# EAGLE board SparkFun GPS NEO_M9N_uFL-Panel (EAGLE 9.4.2), part 1 of 3
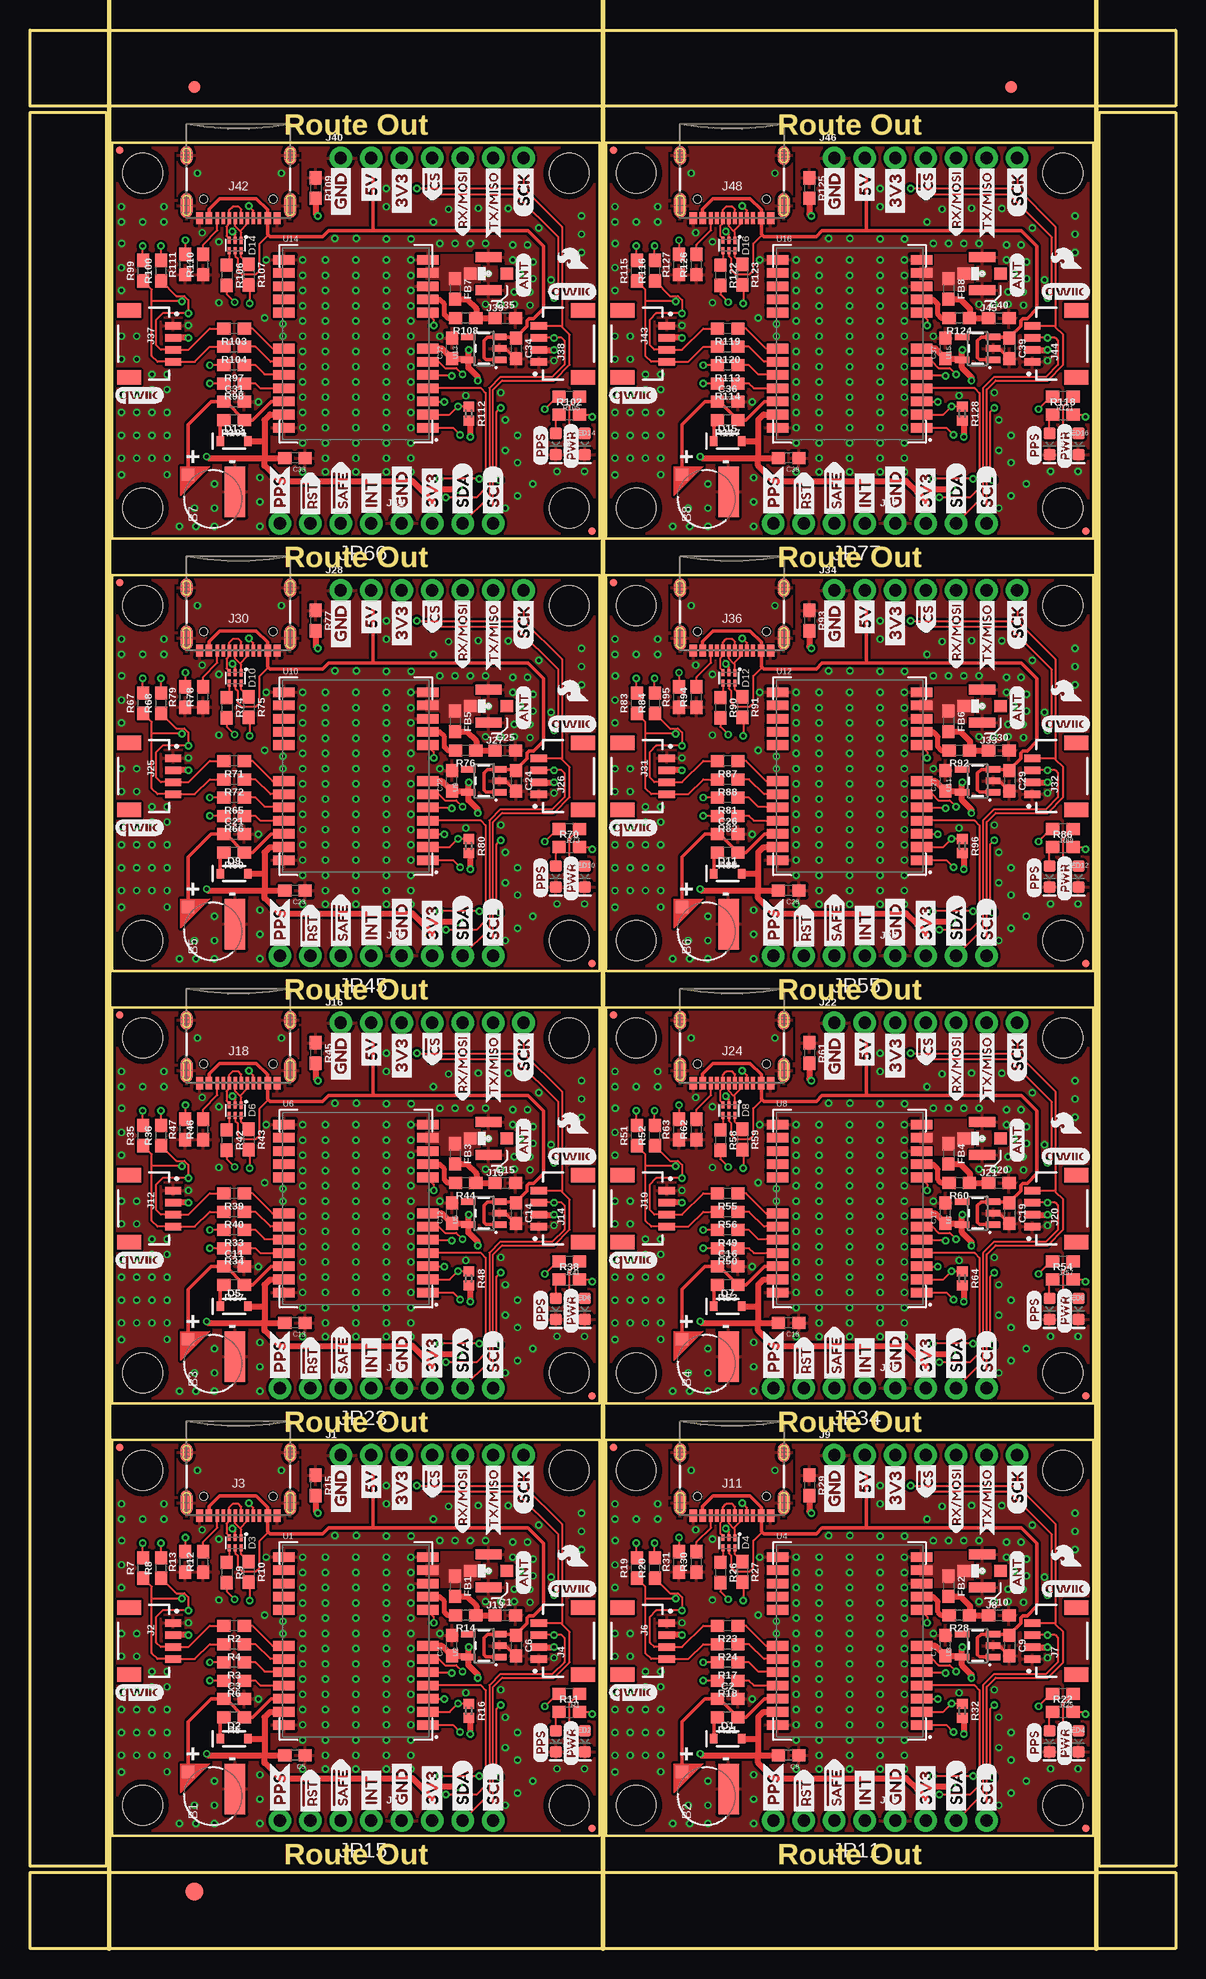
[diagram p0: board, top side]
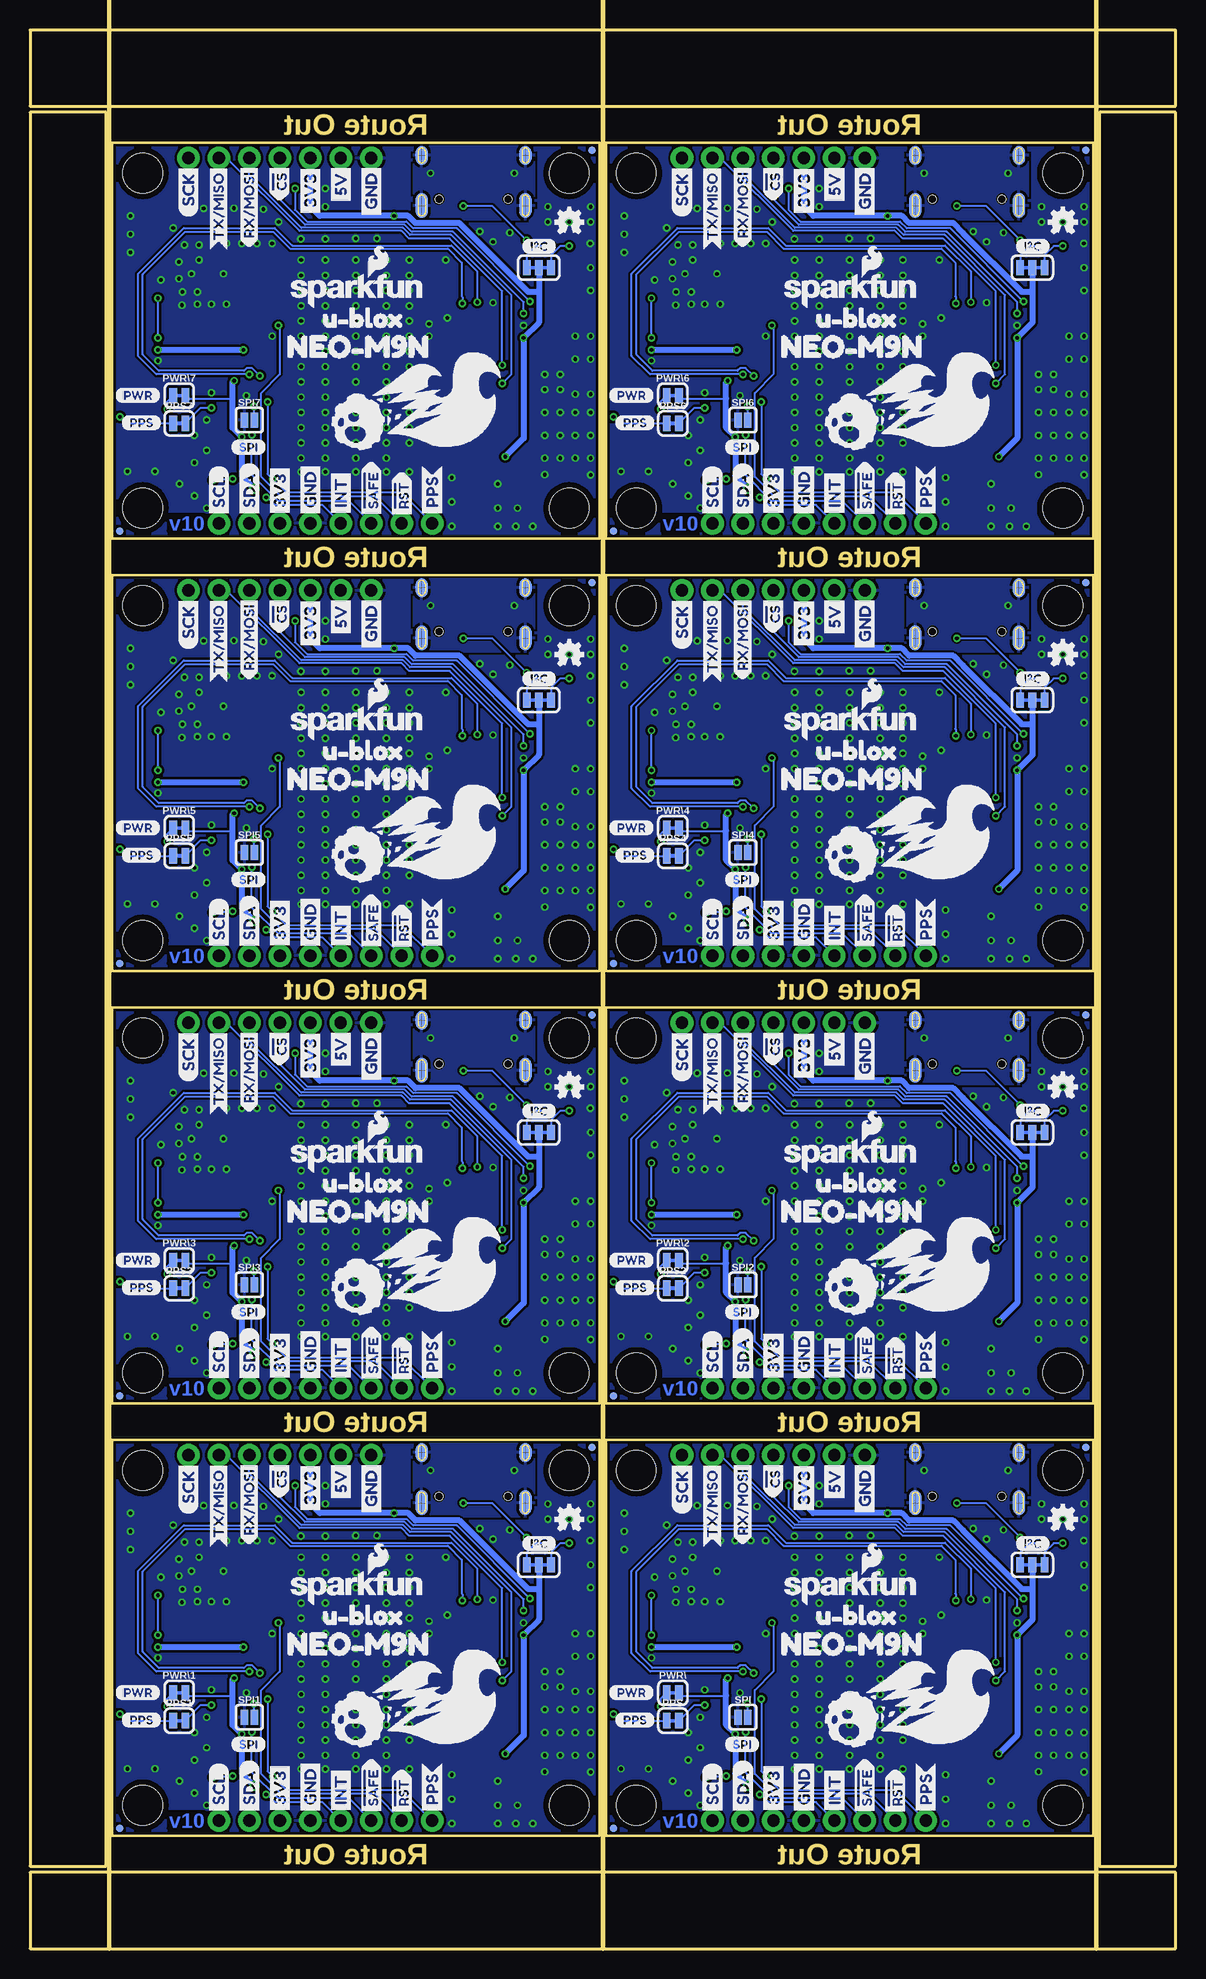
[diagram p1: board, bottom side, seen from below]

Size 95.5 x 159.92 mm. Coordinates in mm from the lower left corner, seen from the top.
Outline: 6.86,9.4 6.86,42.39 47.5,42.39 47.5,9.4 6.86,9.4
Outline: 48.01,9.4 48.01,42.39 88.65,42.39 88.65,9.4 48.01,9.4
Outline: 6.86,45.44 6.86,78.44 47.5,78.44 47.5,45.44 6.86,45.44
Outline: 48.01,45.44 48.01,78.44 88.65,78.44 88.65,45.44 48.01,45.44
Outline: 6.86,81.48 6.86,114.48 47.5,114.48 47.5,81.48 6.86,81.48
Outline: 48.01,81.48 48.01,114.48 88.65,114.48 88.65,81.48 48.01,81.48
Outline: 6.86,117.53 6.86,150.52 47.5,150.52 47.5,117.53 6.86,117.53
Outline: 48.01,117.53 48.01,150.52 88.65,150.52 88.65,117.53 48.01,117.53
Outline: 0,6.35 95.5,6.35 95.5,0 0,0 0,6.35
Outline: 89.15,153.06 95.5,153.06 95.5,6.86 89.15,6.86 89.15,153.06
Outline: 0,159.92 95.5,159.92 95.5,153.57 0,153.57 0,159.92
Outline: 0,153.06 6.35,153.06 6.35,6.86 0,6.86 0,153.06
Copper layers (1*16): Top 0.035mm / dielectric 1.5mm / Bottom 0.035mm
Design rules "SparkFun-2-layer-PCBWay-LIMIT": minimum track width 6mil, minimum drill 0.3mm, track to track 6mil, track to pad 6mil, pad to pad 6mil, via to via 6mil, smd to smd 6mil, copper to edge 6mil, drill to drill 6mil, minimum pad ring 6mil, minimum via ring 6mil, stop-mask expansion 4mil, vias tented up to drill 25mil, thermal gap 10mil
Net classes: 2 3.3V: width 0.508 mm
Milling: 3 lines

## Footprints (pad centres in the part's own frame; a part is rotated, then mirrored left to right if it is on the bottom)
ML414H_IV01E = smd 1 x 1: + 2.022,2.032 | smd 4.2 x 1.7: - 0.6,-1.85
0603 = smd 1.1 x 1: 1 -0.85,0; 2 0.85,0
SOD-323 = smd 0.63 x 0.83: A 1.15,0; C -1.15,0
SOT886 = smd 0.61 x 0.25: 1 -0.405,0.5 | smd 0.56 x 0.25: 2 -0.43,0; 3 -0.43,-0.5; 4 0.43,-0.5; 5 0.43,0; 6 0.43,0.5
FIDUCIAL-1X2 = smd 1 x 1: 1 0,0
FIDUCIAL-1.5X3 = smd 1.5 x 1.5: 1 0,0
1X07_NO_SILK = drill 1.016 pad 1.88: 1 0,0; 2 2.54,0; 3 5.08,0; 4 7.62,0; 5 10.16,0; 6 12.7,0; 7 15.24,0
JST04_1MM_RA = smd 0.6 x 1.35: 1 -1.5,0; 2 -0.5,0; 3 0.5,0; 4 1.5,0 | smd 1.2 x 2: NC1 2.8,-3.675; NC2 -2.8,-3.675
USB-C-16P = smd 0.3 x 1.016: A5 -1.25,0.154; A6 -0.25,0.154; A7 0.25,0.154; A8 1.25,0.154; B5 1.75,0.154; B6 0.75,0.154; B7 -0.75,0.154; B8 -1.75,0.154 | smd 0.6 x 1.016: GND -3.225,0.154; GND2 3.225,0.154 | smd 1 x 2.1: SHLD1 -4.32,-0.915; SHLD2 4.32,-0.915 | smd 1 x 2.1 bottom: SHLD3 -4.32,-0.915; SHLD4 4.32,-0.915 | smd 1 x 1.6: SHLD5 -4.32,-5.095; SHLD8 4.32,-5.095 | smd 1 x 1.6 bottom: SHLD6 -4.32,-5.095; SHLD7 4.32,-5.095 | smd 0.55 x 1.016: VBUS1 -2.45,0.154; VBUS2 2.45,0.154 | hole 0.65: -2.89,-1.445; 2.89,-1.445
1X04_NO_SILK = drill 1.016 pad 1.88: 1 0,0; 2 2.54,0; 3 5.08,0; 4 7.62,0
U.FL = smd 2.2 x 0.85: 1 0,1.375; 2 0,-1.375 | smd 1.05 x 1: FEED 1.525,0; NC -1.525,0
STAND-OFF = hole 3.302: 0,0
MICRO-FIDUCIAL = smd 0.635 x 0.635: 1 0,0
SMT-JUMPER_3_2-NC_TRACE_SILK = smd 0.635 x 1.27: 1 -1.016,0; 2 0,0; 3 1.016,0
LED-0603 = smd 1 x 1: A -0.877,0; C 0.877,0
SMT-JUMPER_2_NC_TRACE_SILK = smd 0.635 x 1.27: 1 -0.508,0; 2 0.508,0
0402 = smd 0.85 x 0.9: 1 -0.58,0; 2 0.58,0
SMT-JUMPER_2_NO_SILK = smd 0.635 x 1.27: 1 -0.406,0; 2 0.406,0
NEO-M9N = smd 1.8 x 0.8: 1 6,-7; 2 6,-5.9; 3 6,-4.8; 4 6,-3.7; 5 6,-2.6; 6 6,-1.5; 7 6,-0.4; 8 6,2.6; 9 6,3.7; 10 6,4.8; 11 6,5.9; 12 6,7; 13 -6,7; 14 -6,5.9; 15 -6,4.8; 16 -6,3.7; 17 -6,2.6; 18 -6,-0.4; 19 -6,-1.5; 20 -6,-2.6; 21 -6,-3.7; 22 -6,-4.8; 23 -6,-5.9; 24 -6,-7
SOT23-5 = smd 0.55 x 1.2: 1 -0.95,-1.3; 2 0,-1.3; 3 0.95,-1.3; 4 0.95,1.3; 5 -0.95,1.3

## Placement (x,y rotation side)
B1  6.8MM_COIN_CELL  [ML414H_IV01E]  15.24,12.7 90 top
B2  6.8MM_COIN_CELL  [ML414H_IV01E]  56.39,12.7 90 top
B3  6.8MM_COIN_CELL  [ML414H_IV01E]  15.24,48.74 90 top
B4  6.8MM_COIN_CELL  [ML414H_IV01E]  56.39,48.74 90 top
B5  6.8MM_COIN_CELL  [ML414H_IV01E]  15.24,84.79 90 top
B6  6.8MM_COIN_CELL  [ML414H_IV01E]  56.39,84.79 90 top
B7  6.8MM_COIN_CELL  [ML414H_IV01E]  15.24,120.83 90 top
B8  6.8MM_COIN_CELL  [ML414H_IV01E]  56.39,120.83 90 top
C1  47pF  [0603]  39.62,27.79 0 top
C2  1.0uF  [0603]  58.17,20.8 0 top
C3  1.0uF  [0603]  17.02,20.8 0 top
C4  1.0uF  [0603]  35.18,25.25 90 top
C5  0.1uF  [0603]  22.1,16.1 180 top
C6  1.0uF  [0603]  40.51,25.25 270 top
C7  1.0uF  [0603]  76.33,25.25 90 top
C8  0.1uF  [0603]  63.25,16.1 180 top
C9  1.0uF  [0603]  81.66,25.25 270 top
C10  47pF  [0603]  80.77,27.79 0 top
C11  1.0uF  [0603]  17.02,56.85 0 top
C12  1.0uF  [0603]  35.18,61.29 90 top
C13  0.1uF  [0603]  22.1,52.15 180 top
C14  1.0uF  [0603]  40.51,61.29 270 top
C15  47pF  [0603]  39.62,63.83 0 top
C16  1.0uF  [0603]  58.17,56.85 0 top
C17  1.0uF  [0603]  76.33,61.29 90 top
C18  0.1uF  [0603]  63.25,52.15 180 top
C19  1.0uF  [0603]  81.66,61.29 270 top
C20  47pF  [0603]  80.77,63.83 0 top
C21  1.0uF  [0603]  17.02,92.89 0 top
C22  1.0uF  [0603]  35.18,97.33 90 top
C23  0.1uF  [0603]  22.1,88.19 180 top
C24  1.0uF  [0603]  40.51,97.33 270 top
C25  47pF  [0603]  39.62,99.87 0 top
C26  1.0uF  [0603]  58.17,92.89 0 top
C27  1.0uF  [0603]  76.33,97.33 90 top
C28  0.1uF  [0603]  63.25,88.19 180 top
C29  1.0uF  [0603]  81.66,97.33 270 top
C30  47pF  [0603]  80.77,99.87 0 top
C31  1.0uF  [0603]  17.02,128.93 0 top
C32  1.0uF  [0603]  35.18,133.38 90 top
C33  0.1uF  [0603]  22.1,124.23 180 top
C34  1.0uF  [0603]  40.51,133.38 270 top
C35  47pF  [0603]  39.62,135.92 0 top
C36  1.0uF  [0603]  58.17,128.93 0 top
C37  1.0uF  [0603]  76.33,133.38 90 top
C38  0.1uF  [0603]  63.25,124.23 180 top
C39  1.0uF  [0603]  81.66,133.38 270 top
C40  47pF  [0603]  80.77,135.92 0 top
D1  0.5A/40V/420mV  [SOD-323]  58.17,17.5 0 top
D2  0.5A/40V/420mV  [SOD-323]  17.02,17.5 0 top
D3  PRTR5V0U2F  [SOT886]  17.12,33.83 270 top
D4  PRTR5V0U2F  [SOT886]  58.27,33.83 270 top
D5  0.5A/40V/420mV  [SOD-323]  17.02,53.54 0 top
D6  PRTR5V0U2F  [SOT886]  17.12,69.88 270 top
D7  0.5A/40V/420mV  [SOD-323]  58.17,53.54 0 top
D8  PRTR5V0U2F  [SOT886]  58.27,69.88 270 top
D9  0.5A/40V/420mV  [SOD-323]  17.02,89.59 0 top
D10  PRTR5V0U2F  [SOT886]  17.12,105.92 270 top
D11  0.5A/40V/420mV  [SOD-323]  58.17,89.59 0 top
D12  PRTR5V0U2F  [SOT886]  58.27,105.92 270 top
D13  0.5A/40V/420mV  [SOD-323]  17.02,125.63 0 top
D14  PRTR5V0U2F  [SOT886]  17.12,141.96 270 top
D15  0.5A/40V/420mV  [SOD-323]  58.17,125.63 0 top
D16  PRTR5V0U2F  [SOT886]  58.27,141.96 270 top
E$1  [FIDUCIAL-1X2]  13.72,155.16 0 top
E$2  [FIDUCIAL-1X2]  81.79,155.16 0 top
E$3  [FIDUCIAL-1.5X3]  13.72,4.76 0 top
FB1  30Ω/1.8A  [0603]  35.43,30.2 270 top
FB2  30Ω/1.8A  [0603]  76.58,30.2 270 top
FB3  30Ω/1.8A  [0603]  35.43,66.24 270 top
FB4  30Ω/1.8A  [0603]  76.58,66.24 270 top
FB5  30Ω/1.8A  [0603]  35.43,102.29 270 top
FB6  30Ω/1.8A  [0603]  76.58,102.29 270 top
FB7  30Ω/1.8A  [0603]  35.43,138.33 270 top
FB8  30Ω/1.8A  [0603]  76.58,138.33 270 top
J1  [1X07_NO_SILK]  25.91,41.12 0 top
J2  Qwiic Right Angle  [JST04_1MM_RA]  11.94,25.63 270 top
J3  [USB-C-16P]  17.37,36.25 180 top
J4  Qwiic Right Angle  [JST04_1MM_RA]  42.42,25.63 90 top
J5  [1X04_NO_SILK]  30.99,10.67 0 top
J6  Qwiic Right Angle  [JST04_1MM_RA]  53.09,25.63 270 top
J7  Qwiic Right Angle  [JST04_1MM_RA]  83.57,25.63 90 top
J8  U.FL  [U.FL]  79.38,31.47 180 top
J9  [1X07_NO_SILK]  67.06,41.12 0 top
J10  [1X04_NO_SILK]  72.14,10.67 0 top
J11  [USB-C-16P]  58.52,36.25 180 top
J12  Qwiic Right Angle  [JST04_1MM_RA]  11.94,61.67 270 top
J13  U.FL  [U.FL]  38.23,31.47 180 top
J14  Qwiic Right Angle  [JST04_1MM_RA]  42.42,61.67 90 top
J15  U.FL  [U.FL]  38.23,67.51 180 top
J16  [1X07_NO_SILK]  25.91,77.17 0 top
J17  [1X04_NO_SILK]  30.99,46.71 0 top
J18  [USB-C-16P]  17.37,72.29 180 top
J19  Qwiic Right Angle  [JST04_1MM_RA]  53.09,61.67 270 top
J20  Qwiic Right Angle  [JST04_1MM_RA]  83.57,61.67 90 top
J21  U.FL  [U.FL]  79.38,67.51 180 top
J22  [1X07_NO_SILK]  67.06,77.17 0 top
J23  [1X04_NO_SILK]  72.14,46.71 0 top
J24  [USB-C-16P]  58.52,72.29 180 top
J25  Qwiic Right Angle  [JST04_1MM_RA]  11.94,97.71 270 top
J26  Qwiic Right Angle  [JST04_1MM_RA]  42.42,97.71 90 top
J27  U.FL  [U.FL]  38.23,103.56 180 top
J28  [1X07_NO_SILK]  25.91,113.21 0 top
J29  [1X04_NO_SILK]  30.99,82.75 0 top
J30  [USB-C-16P]  17.37,108.33 180 top
J31  Qwiic Right Angle  [JST04_1MM_RA]  53.09,97.71 270 top
J32  Qwiic Right Angle  [JST04_1MM_RA]  83.57,97.71 90 top
J33  U.FL  [U.FL]  79.38,103.56 180 top
J34  [1X07_NO_SILK]  67.06,113.21 0 top
J35  [1X04_NO_SILK]  72.14,82.75 0 top
J36  [USB-C-16P]  58.52,108.33 180 top
J37  Qwiic Right Angle  [JST04_1MM_RA]  11.94,133.76 270 top
J38  Qwiic Right Angle  [JST04_1MM_RA]  42.42,133.76 90 top
J39  U.FL  [U.FL]  38.23,139.6 180 top
J40  [1X07_NO_SILK]  25.91,149.25 0 top
J41  [1X04_NO_SILK]  30.99,118.8 0 top
J42  [USB-C-16P]  17.37,144.37 180 top
J43  Qwiic Right Angle  [JST04_1MM_RA]  53.09,133.76 270 top
J44  Qwiic Right Angle  [JST04_1MM_RA]  83.57,133.76 90 top
J45  U.FL  [U.FL]  79.38,139.6 180 top
J46  [1X07_NO_SILK]  67.06,149.25 0 top
J47  [1X04_NO_SILK]  72.14,118.8 0 top
J48  [USB-C-16P]  58.52,144.37 180 top
JP1  STAND-OFF  [STAND-OFF]  50.55,39.85 0 top
JP2  STAND-OFF  [STAND-OFF]  86.11,39.85 0 top
JP3  FIDUCIALUFIDUCIAL  [MICRO-FIDUCIAL]  88.01,10.03 0 top
JP4  FIDUCIALUFIDUCIAL  [MICRO-FIDUCIAL]  48.64,41.76 0 top
JP5  JUMPER-SMT_3_2-NC_TRACE_SILK  [SMT-JUMPER_3_2-NC_TRACE_SILK]  11.94,31.98 0 bottom
JP6  JUMPER-SMT_3_2-NC_TRACE_SILK  [SMT-JUMPER_3_2-NC_TRACE_SILK]  53.09,31.98 0 bottom
JP7  FIDUCIALUFIDUCIAL  [MICRO-FIDUCIAL]  88.01,10.03 0 bottom
JP8  FIDUCIALUFIDUCIAL  [MICRO-FIDUCIAL]  48.64,41.76 0 bottom
JP9  STAND-OFF  [STAND-OFF]  50.55,11.94 0 top
JP10  STAND-OFF  [STAND-OFF]  86.11,11.94 0 top
JP11  [1X04_NO_SILK]  69.6,10.67 180 top
JP12  STAND-OFF  [STAND-OFF]  9.4,75.9 0 top
JP13  STAND-OFF  [STAND-OFF]  44.96,75.9 0 top
JP14  FIDUCIALUFIDUCIAL  [MICRO-FIDUCIAL]  46.86,46.08 0 top
JP15  [1X04_NO_SILK]  28.45,10.67 180 top
JP16  FIDUCIALUFIDUCIAL  [MICRO-FIDUCIAL]  7.49,77.8 0 top
JP17  JUMPER-SMT_3_2-NC_TRACE_SILK  [SMT-JUMPER_3_2-NC_TRACE_SILK]  11.94,68.02 0 bottom
JP18  FIDUCIALUFIDUCIAL  [MICRO-FIDUCIAL]  46.86,46.08 0 bottom
JP19  FIDUCIALUFIDUCIAL  [MICRO-FIDUCIAL]  7.49,77.8 0 bottom
JP20  STAND-OFF  [STAND-OFF]  9.4,47.98 0 top
JP21  FIDUCIALUFIDUCIAL  [MICRO-FIDUCIAL]  46.86,10.03 0 top
JP22  STAND-OFF  [STAND-OFF]  44.96,47.98 0 top
JP23  [1X04_NO_SILK]  28.45,46.71 180 top
JP24  STAND-OFF  [STAND-OFF]  50.55,75.9 0 top
JP25  STAND-OFF  [STAND-OFF]  86.11,75.9 0 top
JP26  FIDUCIALUFIDUCIAL  [MICRO-FIDUCIAL]  88.01,46.08 0 top
JP27  FIDUCIALUFIDUCIAL  [MICRO-FIDUCIAL]  48.64,77.8 0 top
JP28  JUMPER-SMT_3_2-NC_TRACE_SILK  [SMT-JUMPER_3_2-NC_TRACE_SILK]  53.09,68.02 0 bottom
JP29  FIDUCIALUFIDUCIAL  [MICRO-FIDUCIAL]  88.01,46.08 0 bottom
JP30  FIDUCIALUFIDUCIAL  [MICRO-FIDUCIAL]  48.64,77.8 0 bottom
JP31  STAND-OFF  [STAND-OFF]  9.4,39.85 0 top
JP32  STAND-OFF  [STAND-OFF]  50.55,47.98 0 top
JP33  STAND-OFF  [STAND-OFF]  86.11,47.98 0 top
JP34  [1X04_NO_SILK]  69.6,46.71 180 top
JP35  STAND-OFF  [STAND-OFF]  9.4,111.94 0 top
JP36  STAND-OFF  [STAND-OFF]  44.96,111.94 0 top
JP37  FIDUCIALUFIDUCIAL  [MICRO-FIDUCIAL]  46.86,82.12 0 top
JP38  FIDUCIALUFIDUCIAL  [MICRO-FIDUCIAL]  7.49,113.84 0 top
JP39  JUMPER-SMT_3_2-NC_TRACE_SILK  [SMT-JUMPER_3_2-NC_TRACE_SILK]  11.94,104.06 0 bottom
JP40  FIDUCIALUFIDUCIAL  [MICRO-FIDUCIAL]  46.86,82.12 0 bottom
JP41  STAND-OFF  [STAND-OFF]  44.96,39.85 0 top
JP42  FIDUCIALUFIDUCIAL  [MICRO-FIDUCIAL]  7.49,113.84 0 bottom
JP43  STAND-OFF  [STAND-OFF]  9.4,84.02 0 top
JP44  STAND-OFF  [STAND-OFF]  44.96,84.02 0 top
JP45  [1X04_NO_SILK]  28.45,82.75 180 top
JP46  STAND-OFF  [STAND-OFF]  50.55,111.94 0 top
JP47  STAND-OFF  [STAND-OFF]  86.11,111.94 0 top
JP48  FIDUCIALUFIDUCIAL  [MICRO-FIDUCIAL]  88.01,82.12 0 top
JP49  FIDUCIALUFIDUCIAL  [MICRO-FIDUCIAL]  48.64,113.84 0 top
JP50  JUMPER-SMT_3_2-NC_TRACE_SILK  [SMT-JUMPER_3_2-NC_TRACE_SILK]  53.09,104.06 0 bottom
JP51  FIDUCIALUFIDUCIAL  [MICRO-FIDUCIAL]  88.01,82.12 0 bottom
JP52  FIDUCIALUFIDUCIAL  [MICRO-FIDUCIAL]  48.64,113.84 0 bottom
JP53  STAND-OFF  [STAND-OFF]  50.55,84.02 0 top
JP54  STAND-OFF  [STAND-OFF]  86.11,84.02 0 top
JP55  [1X04_NO_SILK]  69.6,82.75 180 top
JP56  STAND-OFF  [STAND-OFF]  9.4,147.98 0 top
JP57  STAND-OFF  [STAND-OFF]  44.96,147.98 0 top
JP58  FIDUCIALUFIDUCIAL  [MICRO-FIDUCIAL]  46.86,118.16 0 top
JP59  FIDUCIALUFIDUCIAL  [MICRO-FIDUCIAL]  7.49,149.89 0 top
JP60  JUMPER-SMT_3_2-NC_TRACE_SILK  [SMT-JUMPER_3_2-NC_TRACE_SILK]  11.94,140.11 0 bottom
JP61  FIDUCIALUFIDUCIAL  [MICRO-FIDUCIAL]  7.49,41.76 0 top
JP62  FIDUCIALUFIDUCIAL  [MICRO-FIDUCIAL]  46.86,118.16 0 bottom
JP63  FIDUCIALUFIDUCIAL  [MICRO-FIDUCIAL]  7.49,149.89 0 bottom
JP64  STAND-OFF  [STAND-OFF]  9.4,120.07 0 top
JP65  STAND-OFF  [STAND-OFF]  44.96,120.07 0 top
JP66  [1X04_NO_SILK]  28.45,118.8 180 top
JP67  STAND-OFF  [STAND-OFF]  50.55,147.98 0 top
JP68  STAND-OFF  [STAND-OFF]  86.11,147.98 0 top
JP69  FIDUCIALUFIDUCIAL  [MICRO-FIDUCIAL]  88.01,118.16 0 top
JP70  FIDUCIALUFIDUCIAL  [MICRO-FIDUCIAL]  48.64,149.89 0 top
JP71  FIDUCIALUFIDUCIAL  [MICRO-FIDUCIAL]  46.86,10.03 0 bottom
JP72  JUMPER-SMT_3_2-NC_TRACE_SILK  [SMT-JUMPER_3_2-NC_TRACE_SILK]  53.09,140.11 0 bottom
JP73  FIDUCIALUFIDUCIAL  [MICRO-FIDUCIAL]  88.01,118.16 0 bottom
JP74  FIDUCIALUFIDUCIAL  [MICRO-FIDUCIAL]  48.64,149.89 0 bottom
JP75  STAND-OFF  [STAND-OFF]  50.55,120.07 0 top
JP76  STAND-OFF  [STAND-OFF]  86.11,120.07 0 top
JP77  [1X04_NO_SILK]  69.6,118.8 180 top
JP81  FIDUCIALUFIDUCIAL  [MICRO-FIDUCIAL]  7.49,41.76 0 bottom
JP91  STAND-OFF  [STAND-OFF]  9.4,11.94 0 top
JP101  STAND-OFF  [STAND-OFF]  44.96,11.94 0 top
LED1  BLUE  [LED-0603]  43.84,17.27 270 top
LED2  RED  [LED-0603]  46.25,17.27 270 top
LED3  BLUE  [LED-0603]  84.99,17.27 270 top
LED4  RED  [LED-0603]  87.4,17.27 270 top
LED5  BLUE  [LED-0603]  43.84,53.31 270 top
LED6  RED  [LED-0603]  46.25,53.31 270 top
LED7  BLUE  [LED-0603]  84.99,53.31 270 top
LED8  RED  [LED-0603]  87.4,53.31 270 top
LED9  BLUE  [LED-0603]  43.84,89.36 270 top
LED10  RED  [LED-0603]  46.25,89.36 270 top
LED11  BLUE  [LED-0603]  84.99,89.36 270 top
LED12  RED  [LED-0603]  87.4,89.36 270 top
LED13  BLUE  [LED-0603]  43.84,125.4 270 top
LED14  RED  [LED-0603]  46.25,125.4 270 top
LED15  BLUE  [LED-0603]  84.99,125.4 270 top
LED16  RED  [LED-0603]  87.4,125.4 270 top
LOGO1  OSHW-LOGOMINI  [OSHW-LOGO-MINI]  9.4,35.79 0 bottom
LOGO2  SFE_LOGO_NAME_FLAME.1_INCH  [SFE_LOGO_NAME_FLAME_.1]  27.05,30.07 0 bottom
LOGO3  OSHW-LOGOMINI  [OSHW-LOGO-MINI]  50.55,35.79 0 bottom
LOGO4  SFE_LOGO_NAME_FLAME.1_INCH  [SFE_LOGO_NAME_FLAME_.1]  68.2,30.07 0 bottom
LOGO5  OSHW-LOGOMINI  [OSHW-LOGO-MINI]  9.4,71.83 0 bottom
LOGO6  SFE_LOGO_NAME_FLAME.1_INCH  [SFE_LOGO_NAME_FLAME_.1]  27.05,66.12 0 bottom
LOGO7  OSHW-LOGOMINI  [OSHW-LOGO-MINI]  50.55,71.83 0 bottom
LOGO8  SFE_LOGO_NAME_FLAME.1_INCH  [SFE_LOGO_NAME_FLAME_.1]  68.2,66.12 0 bottom
LOGO9  OSHW-LOGOMINI  [OSHW-LOGO-MINI]  9.4,107.87 0 bottom
LOGO10  SFE_LOGO_NAME_FLAME.1_INCH  [SFE_LOGO_NAME_FLAME_.1]  27.05,102.16 0 bottom
LOGO11  OSHW-LOGOMINI  [OSHW-LOGO-MINI]  50.55,107.87 0 bottom
LOGO12  SFE_LOGO_NAME_FLAME.1_INCH  [SFE_LOGO_NAME_FLAME_.1]  68.2,102.16 0 bottom
LOGO13  OSHW-LOGOMINI  [OSHW-LOGO-MINI]  9.4,143.92 0 bottom
LOGO14  SFE_LOGO_NAME_FLAME.1_INCH  [SFE_LOGO_NAME_FLAME_.1]  27.05,138.2 0 bottom
LOGO15  OSHW-LOGOMINI  [OSHW-LOGO-MINI]  50.55,143.92 0 bottom
LOGO16  SFE_LOGO_NAME_FLAME.1_INCH  [SFE_LOGO_NAME_FLAME_.1]  68.2,138.2 0 bottom
PPS  JUMPER-SMT_2_NC_TRACE_SILK  [SMT-JUMPER_2_NC_TRACE_SILK]  41.91,19 0 bottom
PPS1  JUMPER-SMT_2_NC_TRACE_SILK  [SMT-JUMPER_2_NC_TRACE_SILK]  83.06,19 0 bottom
PPS2  JUMPER-SMT_2_NC_TRACE_SILK  [SMT-JUMPER_2_NC_TRACE_SILK]  41.91,55.04 0 bottom
PPS3  JUMPER-SMT_2_NC_TRACE_SILK  [SMT-JUMPER_2_NC_TRACE_SILK]  83.06,55.04 0 bottom
PPS4  JUMPER-SMT_2_NC_TRACE_SILK  [SMT-JUMPER_2_NC_TRACE_SILK]  41.91,91.08 0 bottom
PPS5  JUMPER-SMT_2_NC_TRACE_SILK  [SMT-JUMPER_2_NC_TRACE_SILK]  83.06,91.08 0 bottom
PPS6  JUMPER-SMT_2_NC_TRACE_SILK  [SMT-JUMPER_2_NC_TRACE_SILK]  41.91,127.13 0 bottom
PPS7  JUMPER-SMT_2_NC_TRACE_SILK  [SMT-JUMPER_2_NC_TRACE_SILK]  83.06,127.13 0 bottom
PWR\  JUMPER-SMT_2_NC_TRACE_SILK  [SMT-JUMPER_2_NC_TRACE_SILK]  41.91,21.31 0 bottom
PWR\1  JUMPER-SMT_2_NC_TRACE_SILK  [SMT-JUMPER_2_NC_TRACE_SILK]  83.06,21.31 0 bottom
PWR\2  JUMPER-SMT_2_NC_TRACE_SILK  [SMT-JUMPER_2_NC_TRACE_SILK]  41.91,57.35 0 bottom
PWR\3  JUMPER-SMT_2_NC_TRACE_SILK  [SMT-JUMPER_2_NC_TRACE_SILK]  83.06,57.35 0 bottom
PWR\4  JUMPER-SMT_2_NC_TRACE_SILK  [SMT-JUMPER_2_NC_TRACE_SILK]  41.91,93.4 0 bottom
PWR\5  JUMPER-SMT_2_NC_TRACE_SILK  [SMT-JUMPER_2_NC_TRACE_SILK]  83.06,93.4 0 bottom
PWR\6  JUMPER-SMT_2_NC_TRACE_SILK  [SMT-JUMPER_2_NC_TRACE_SILK]  41.91,129.44 0 bottom
PWR\7  JUMPER-SMT_2_NC_TRACE_SILK  [SMT-JUMPER_2_NC_TRACE_SILK]  83.06,129.44 0 bottom
R1  1k  [0603]  44.96,21.23 180 top
R2  33  [0603]  17.02,26.9 180 top
R3  33  [0603]  17.02,23.85 180 top
R4  33  [0603]  17.02,25.37 180 top
R5  1k  [0603]  17.02,19.28 180 top
R6  33  [0603]  17.02,22.33 180 top
R7  2.2k  [0603]  9.45,31.72 90 top
R8  2.2k  [0603]  10.95,31.72 90 top
R9  27  [0603]  16.41,31.34 270 top
R10  27  [0603]  18.24,31.39 270 top
R11  1k  [0603]  44.96,19.71 0 top
R12  5.1k  [0603]  14.43,32.23 90 top
R13  5.1k  [0603]  12.95,32.23 90 top
R14  10  [0603]  36.32,27.79 180 top
R15  100k  [0603]  23.83,38.61 270 top
R16  10k  [0402]  36.58,19.81 270 top
R17  33  [0603]  58.17,23.85 180 top
R18  33  [0603]  58.17,22.33 180 top
R19  2.2k  [0603]  50.6,31.72 90 top
R20  2.2k  [0603]  52.1,31.72 90 top
R21  1k  [0603]  58.17,19.28 180 top
R22  1k  [0603]  86.11,19.71 0 top
R23  33  [0603]  58.17,26.9 180 top
R24  33  [0603]  58.17,25.37 180 top
R25  1k  [0603]  86.11,21.23 180 top
R26  27  [0603]  57.56,31.34 270 top
R27  27  [0603]  59.39,31.39 270 top
R28  10  [0603]  77.47,27.79 180 top
R29  100k  [0603]  64.97,38.61 270 top
R30  5.1k  [0603]  55.58,32.23 90 top
R31  5.1k  [0603]  54.1,32.23 90 top
R32  10k  [0402]  77.72,19.81 270 top
R33  33  [0603]  17.02,59.89 180 top
R34  33  [0603]  17.02,58.37 180 top
R35  2.2k  [0603]  9.45,67.77 90 top
R36  2.2k  [0603]  10.95,67.77 90 top
R37  1k  [0603]  17.02,55.32 180 top
R38  1k  [0603]  44.96,55.75 0 top
R39  33  [0603]  17.02,62.94 180 top
R40  33  [0603]  17.02,61.42 180 top
R41  1k  [0603]  44.96,57.28 180 top
R42  27  [0603]  16.41,67.39 270 top
R43  27  [0603]  18.24,67.44 270 top
R44  10  [0603]  36.32,63.83 180 top
R45  100k  [0603]  23.83,74.65 270 top
R46  5.1k  [0603]  14.43,68.28 90 top
R47  5.1k  [0603]  12.95,68.28 90 top
R48  10k  [0402]  36.58,55.85 270 top
R49  33  [0603]  58.17,59.89 180 top
R50  33  [0603]  58.17,58.37 180 top
R51  2.2k  [0603]  50.6,67.77 90 top
R52  2.2k  [0603]  52.1,67.77 90 top
R53  1k  [0603]  58.17,55.32 180 top
R54  1k  [0603]  86.11,55.75 0 top
R55  33  [0603]  58.17,62.94 180 top
R56  33  [0603]  58.17,61.42 180 top
R57  1k  [0603]  86.11,57.28 180 top
R58  27  [0603]  57.56,67.39 270 top
R59  27  [0603]  59.39,67.44 270 top
R60  10  [0603]  77.47,63.83 180 top
R61  100k  [0603]  64.97,74.65 270 top
R62  5.1k  [0603]  55.58,68.28 90 top
R63  5.1k  [0603]  54.1,68.28 90 top
R64  10k  [0402]  77.72,55.85 270 top
R65  33  [0603]  17.02,95.94 180 top
R66  33  [0603]  17.02,94.41 180 top
R67  2.2k  [0603]  9.45,103.81 90 top
R68  2.2k  [0603]  10.95,103.81 90 top
R69  1k  [0603]  17.02,91.36 180 top
R70  1k  [0603]  44.96,91.8 0 top
R71  33  [0603]  17.02,98.98 180 top
R72  33  [0603]  17.02,97.46 180 top
R73  1k  [0603]  44.96,93.32 180 top
R74  27  [0603]  16.41,103.43 270 top
R75  27  [0603]  18.24,103.48 270 top
R76  10  [0603]  36.32,99.87 180 top
R77  100k  [0603]  23.83,110.69 270 top
R78  5.1k  [0603]  14.43,104.32 90 top
R79  5.1k  [0603]  12.95,104.32 90 top
R80  10k  [0402]  36.58,91.9 270 top
R81  33  [0603]  58.17,95.94 180 top
R82  33  [0603]  58.17,94.41 180 top
R83  2.2k  [0603]  50.6,103.81 90 top
R84  2.2k  [0603]  52.1,103.81 90 top
R85  1k  [0603]  58.17,91.36 180 top
R86  1k  [0603]  86.11,91.8 0 top
R87  33  [0603]  58.17,98.98 180 top
R88  33  [0603]  58.17,97.46 180 top
R89  1k  [0603]  86.11,93.32 180 top
R90  27  [0603]  57.56,103.43 270 top
R91  27  [0603]  59.39,103.48 270 top
R92  10  [0603]  77.47,99.87 180 top
R93  100k  [0603]  64.97,110.69 270 top
R94  5.1k  [0603]  55.58,104.32 90 top
R95  5.1k  [0603]  54.1,104.32 90 top
R96  10k  [0402]  77.72,91.9 270 top
R97  33  [0603]  17.02,131.98 180 top
R98  33  [0603]  17.02,130.45 180 top
R99  2.2k  [0603]  9.45,139.85 90 top
R100  2.2k  [0603]  10.95,139.85 90 top
R101  1k  [0603]  17.02,127.41 180 top
R102  1k  [0603]  44.96,127.84 0 top
R103  33  [0603]  17.02,135.03 180 top
R104  33  [0603]  17.02,133.5 180 top
R105  1k  [0603]  44.96,129.36 180 top
R106  27  [0603]  16.41,139.47 270 top
R107  27  [0603]  18.24,139.52 270 top
R108  10  [0603]  36.32,135.92 180 top
R109  100k  [0603]  23.83,146.74 270 top
R110  5.1k  [0603]  14.43,140.36 90 top
R111  5.1k  [0603]  12.95,140.36 90 top
R112  10k  [0402]  36.58,127.94 270 top
R113  33  [0603]  58.17,131.98 180 top
R114  33  [0603]  58.17,130.45 180 top
R115  2.2k  [0603]  50.6,139.85 90 top
R116  2.2k  [0603]  52.1,139.85 90 top
R117  1k  [0603]  58.17,127.41 180 top
R118  1k  [0603]  86.11,127.84 0 top
R119  33  [0603]  58.17,135.03 180 top
R120  33  [0603]  58.17,133.5 180 top
R121  1k  [0603]  86.11,129.36 180 top
R122  27  [0603]  57.56,139.47 270 top
R123  27  [0603]  59.39,139.52 270 top
R124  10  [0603]  77.47,135.92 180 top
R125  100k  [0603]  64.97,146.74 270 top
R126  5.1k  [0603]  55.58,140.36 90 top
R127  5.1k  [0603]  54.1,140.36 90 top
R128  10k  [0402]  77.72,127.94 270 top
SPI  JUMPER-SMT_2_NO_SILK  [SMT-JUMPER_2_NO_SILK]  36.07,19.28 0 bottom
SPI1  JUMPER-SMT_2_NO_SILK  [SMT-JUMPER_2_NO_SILK]  77.22,19.28 0 bottom
SPI2  JUMPER-SMT_2_NO_SILK  [SMT-JUMPER_2_NO_SILK]  36.07,55.32 0 bottom
SPI3  JUMPER-SMT_2_NO_SILK  [SMT-JUMPER_2_NO_SILK]  77.22,55.32 0 bottom
SPI4  JUMPER-SMT_2_NO_SILK  [SMT-JUMPER_2_NO_SILK]  36.07,91.36 0 bottom
SPI5  JUMPER-SMT_2_NO_SILK  [SMT-JUMPER_2_NO_SILK]  77.22,91.36 0 bottom
SPI6  JUMPER-SMT_2_NO_SILK  [SMT-JUMPER_2_NO_SILK]  36.07,127.41 0 bottom
SPI7  JUMPER-SMT_2_NO_SILK  [SMT-JUMPER_2_NO_SILK]  77.22,127.41 0 bottom
U1  U-BLOX_NEO-M9N  [NEO-M9N]  27.18,25.63 0 top
U2  3.3V  [SOT23-5]  37.85,25.25 90 top
U3  3.3V  [SOT23-5]  78.99,25.25 90 top
U4  U-BLOX_NEO-M9N  [NEO-M9N]  68.33,25.63 0 top
U5  3.3V  [SOT23-5]  37.85,61.29 90 top
U6  U-BLOX_NEO-M9N  [NEO-M9N]  27.18,61.67 0 top
U7  3.3V  [SOT23-5]  78.99,61.29 90 top
U8  U-BLOX_NEO-M9N  [NEO-M9N]  68.33,61.67 0 top
U9  3.3V  [SOT23-5]  37.85,97.33 90 top
U10  U-BLOX_NEO-M9N  [NEO-M9N]  27.18,97.71 0 top
U11  3.3V  [SOT23-5]  78.99,97.33 90 top
U12  U-BLOX_NEO-M9N  [NEO-M9N]  68.33,97.71 0 top
U13  3.3V  [SOT23-5]  37.85,133.38 90 top
U14  U-BLOX_NEO-M9N  [NEO-M9N]  27.18,133.76 0 top
U15  3.3V  [SOT23-5]  78.99,133.38 90 top
U16  U-BLOX_NEO-M9N  [NEO-M9N]  68.33,133.76 0 top
U$1  [SDA-[)]  36.07,11.05 90 top
U$2  [NEO#M9N1]  34.54,25.4 0 bottom
U$3  [SCL-[)]  38.61,11.05 90 top
U$4  [SDA-[)]  36.07,11.05 90 bottom
U$5  [SCL-[)]  38.61,11.05 90 bottom
U$6  [3V3-04]  33.53,11.05 90 top
U$7  [3V3-04]  33.53,11.05 90 bottom
U$8  [GND-04]  30.99,11.05 90 top
U$9  [GND-04]  30.99,11.05 90 bottom
U$10  [I_SUPER2_C-()-03]  13.34,33.76 0 bottom
U$11  [SPI1]  37.59,17.02 0 bottom
U$12  [PPS0]  46.74,19.05 0 bottom
U$13  [QWIIC_4MM]  45.21,29.97 0 top
U$14  [QWIIC_4MM]  9.14,21.34 0 top
U$15  [INT8]  28.45,11.05 90 top
U$16  [INT8]  28.45,11.05 90 bottom
U$17  [PWR1]  47.24,21.34 0 bottom
U$18  [PWR-()-03]  45.11,15.24 90 top
U$19  [5V]  28.45,37.06 90 top
U$20  [5V]  28.45,37.06 90 bottom
U$21  [NEO_GPS_BOARD_SILK_FINAL#03#JPG]  22.1,20.83 0 bottom
U$22  [U#BLOX3]  31.37,27.79 0 bottom
U$23  [CS#-<]]  33.55,37.31 90 top
U$24  [CS#-<]]  33.55,37.31 90 bottom
U$25  [ANT0]  41.15,29.46 90 top
U$26  [RX#MOSI2]  36.07,34.57 90 top
U$27  [SDA-[)]  77.22,11.05 90 top
U$28  [SCL-[)]  79.76,11.05 90 top
U$29  [SDA-[)]  77.22,11.05 90 bottom
U$30  [SCL-[)]  79.76,11.05 90 bottom
U$31  [RX#MOSI3]  36.09,33.63 90 bottom
U$32  [3V3-04]  74.68,11.05 90 top
U$33  [SFE_LOGO_FLAME_.1]  45.21,32.74 90 top
U$34  [TX#MISO0]  38.63,34.39 90 top
U$35  [#RST3]  23.37,10.79 90 top
U$36  [#RST3]  23.37,10.79 90 bottom
U$37  [TX#MISO1]  38.63,33.43 90 bottom
U$38  [SCK-(]-04]  41.15,36.2 90 top
U$39  [#SAFE1]  25.91,10.79 90 top
U$40  [#SAFE1]  25.91,10.79 90 bottom
U$41  [SCK-(]-04]  41.15,36.2 90 bottom
U$42  [3V3-04]  74.68,11.05 90 bottom
U$43  [PPS5]  20.83,11.05 90 top
U$44  [PPS5]  20.83,11.05 90 bottom
U$45  [GND-04]  72.14,11.05 90 top
U$46  [GND-04]  72.14,11.05 90 bottom
U$47  [I_SUPER2_C-()-03]  54.48,33.76 0 bottom
U$48  [INT8]  69.6,11.05 90 top
U$49  [INT8]  69.6,11.05 90 bottom
U$50  [U#BLOX3]  72.52,27.79 0 bottom
U$51  [#RST3]  64.52,10.79 90 top
U$52  [PPS0]  42.57,15.49 90 top
U$53  [#RST3]  64.52,10.79 90 bottom
U$54  [#SAFE1]  67.06,10.79 90 top
U$55  [#SAFE1]  67.06,10.79 90 bottom
U$56  [PPS5]  61.98,11.05 90 top
U$57  [PPS5]  61.98,11.05 90 bottom
U$58  [PPS0]  83.72,15.49 90 top
U$59  [3V3-04]  72.14,36.04 90 bottom
U$60  [3V3-04]  30.99,36.04 90 bottom
U$61  [3V3-04]  30.99,36.04 90 top
U$62  [GND-04]  25.91,35.92 90 bottom
U$63  [GND-04]  25.91,35.92 90 top
U$64  [3V3-04]  72.14,36.04 90 top
U$65  [GND-04]  67.06,35.92 90 bottom
U$66  [GND-04]  67.06,35.92 90 top
U$67  [PWR-()-03]  86.26,15.24 90 top
U$68  [5V]  69.6,37.06 90 top
U$69  [5V]  69.6,37.06 90 bottom
U$70  [CS#-<]]  74.7,37.31 90 top
U$71  [CS#-<]]  74.7,37.31 90 bottom
U$72  [SCK-(]-04]  82.3,36.2 90 top
U$73  [SCK-(]-04]  82.3,36.2 90 bottom
U$74  [SFE_LOGO_FLAME_.1]  86.36,32.74 90 top
U$75  [RX#MOSI2]  77.22,34.57 90 top
U$76  [RX#MOSI3]  77.24,33.63 90 bottom
U$77  [TX#MISO0]  79.78,34.39 90 top
U$78  [TX#MISO1]  79.78,33.43 90 bottom
U$79  [NEO#M9N1]  75.69,25.4 0 bottom
U$80  [SPI1]  78.74,17.02 0 bottom
U$81  [QWIIC_4MM]  86.36,29.97 0 top
U$82  [QWIIC_4MM]  50.29,21.34 0 top
U$83  [PPS0]  87.88,19.05 0 bottom
U$84  [PWR1]  88.39,21.34 0 bottom
U$85  [NEO_GPS_BOARD_SILK_FINAL#03#JPG]  63.25,20.83 0 bottom
U$86  [ANT0]  82.3,29.46 90 top
U$87  [SDA-[)]  36.07,47.09 90 top
U$88  [SCL-[)]  38.61,47.09 90 top
U$89  [SDA-[)]  36.07,47.09 90 bottom
U$90  [SCL-[)]  38.61,47.09 90 bottom
U$91  [3V3-04]  33.53,47.09 90 top
U$92  [3V3-04]  33.53,47.09 90 bottom
U$93  [GND-04]  30.99,47.09 90 top
U$94  [GND-04]  30.99,47.09 90 bottom
U$95  [I_SUPER2_C-()-03]  13.34,69.8 0 bottom
U$96  [INT8]  28.45,47.09 90 top
U$97  [INT8]  28.45,47.09 90 bottom
U$98  [U#BLOX3]  31.37,63.83 0 bottom
U$99  [#RST3]  23.37,46.84 90 top
U$100  [#RST3]  23.37,46.84 90 bottom
U$101  [#SAFE1]  25.91,46.84 90 top
U$102  [#SAFE1]  25.91,46.84 90 bottom
U$103  [PPS5]  20.83,47.09 90 top
U$104  [PPS5]  20.83,47.09 90 bottom
U$105  [PPS0]  42.57,51.54 90 top
U$106  [3V3-04]  30.99,72.09 90 bottom
U$107  [3V3-04]  30.99,72.09 90 top
U$108  [GND-04]  25.91,71.96 90 bottom
U$109  [GND-04]  25.91,71.96 90 top
U$110  [PWR-()-03]  45.11,51.28 90 top
U$111  [5V]  28.45,73.1 90 top
U$112  [5V]  28.45,73.1 90 bottom
U$113  [CS#-<]]  33.55,73.36 90 top
U$114  [CS#-<]]  33.55,73.36 90 bottom
U$115  [SCK-(]-04]  41.15,72.24 90 top
U$116  [SCK-(]-04]  41.15,72.24 90 bottom
U$117  [SFE_LOGO_FLAME_.1]  45.21,68.78 90 top
U$118  [RX#MOSI2]  36.07,70.61 90 top
U$119  [RX#MOSI3]  36.09,69.67 90 bottom
U$120  [TX#MISO0]  38.63,70.43 90 top
U$121  [TX#MISO1]  38.63,69.47 90 bottom
U$122  [NEO#M9N1]  34.54,61.44 0 bottom
U$123  [SPI1]  37.59,53.06 0 bottom
U$124  [QWIIC_4MM]  45.21,66.01 0 top
U$125  [QWIIC_4MM]  9.14,57.38 0 top
U$126  [PPS0]  46.74,55.09 0 bottom
U$127  [PWR1]  47.24,57.38 0 bottom
U$128  [NEO_GPS_BOARD_SILK_FINAL#03#JPG]  22.1,56.87 0 bottom
U$129  [ANT0]  41.15,65.51 90 top
U$130  [SDA-[)]  77.22,47.09 90 top
U$131  [SCL-[)]  79.76,47.09 90 top
U$132  [SDA-[)]  77.22,47.09 90 bottom
U$133  [SCL-[)]  79.76,47.09 90 bottom
U$134  [3V3-04]  74.68,47.09 90 top
U$135  [3V3-04]  74.68,47.09 90 bottom
U$136  [GND-04]  72.14,47.09 90 top
U$137  [GND-04]  72.14,47.09 90 bottom
U$138  [I_SUPER2_C-()-03]  54.48,69.8 0 bottom
U$139  [INT8]  69.6,47.09 90 top
U$140  [INT8]  69.6,47.09 90 bottom
U$141  [U#BLOX3]  72.52,63.83 0 bottom
U$142  [#RST3]  64.52,46.84 90 top
U$143  [#RST3]  64.52,46.84 90 bottom
U$144  [#SAFE1]  67.06,46.84 90 top
U$145  [#SAFE1]  67.06,46.84 90 bottom
U$146  [PPS5]  61.98,47.09 90 top
U$147  [PPS5]  61.98,47.09 90 bottom
U$148  [PPS0]  83.72,51.54 90 top
U$149  [3V3-04]  72.14,72.09 90 bottom
U$150  [3V3-04]  72.14,72.09 90 top
U$151  [GND-04]  67.06,71.96 90 bottom
U$152  [GND-04]  67.06,71.96 90 top
U$153  [PWR-()-03]  86.26,51.28 90 top
U$154  [5V]  69.6,73.1 90 top
U$155  [5V]  69.6,73.1 90 bottom
U$156  [CS#-<]]  74.7,73.36 90 top
U$157  [CS#-<]]  74.7,73.36 90 bottom
U$158  [SCK-(]-04]  82.3,72.24 90 top
U$159  [SCK-(]-04]  82.3,72.24 90 bottom
U$160  [SFE_LOGO_FLAME_.1]  86.36,68.78 90 top
U$161  [RX#MOSI2]  77.22,70.61 90 top
U$162  [RX#MOSI3]  77.24,69.67 90 bottom
U$163  [TX#MISO0]  79.78,70.43 90 top
U$164  [TX#MISO1]  79.78,69.47 90 bottom
U$165  [NEO#M9N1]  75.69,61.44 0 bottom
U$166  [SPI1]  78.74,53.06 0 bottom
U$167  [QWIIC_4MM]  86.36,66.01 0 top
U$168  [QWIIC_4MM]  50.29,57.38 0 top
U$169  [PPS0]  87.88,55.09 0 bottom
U$170  [PWR1]  88.39,57.38 0 bottom
U$171  [NEO_GPS_BOARD_SILK_FINAL#03#JPG]  63.25,56.87 0 bottom
U$172  [ANT0]  82.3,65.51 90 top
U$173  [SDA-[)]  36.07,83.13 90 top
U$174  [SCL-[)]  38.61,83.13 90 top
U$175  [SDA-[)]  36.07,83.13 90 bottom
U$176  [SCL-[)]  38.61,83.13 90 bottom
U$177  [3V3-04]  33.53,83.13 90 top
U$178  [3V3-04]  33.53,83.13 90 bottom
U$179  [GND-04]  30.99,83.13 90 top
U$180  [GND-04]  30.99,83.13 90 bottom
U$181  [I_SUPER2_C-()-03]  13.34,105.84 0 bottom
U$182  [INT8]  28.45,83.13 90 top
U$183  [INT8]  28.45,83.13 90 bottom
U$184  [U#BLOX3]  31.37,99.87 0 bottom
U$185  [#RST3]  23.37,82.88 90 top
U$186  [#RST3]  23.37,82.88 90 bottom
U$187  [#SAFE1]  25.91,82.88 90 top
U$188  [#SAFE1]  25.91,82.88 90 bottom
U$189  [PPS5]  20.83,83.13 90 top
U$190  [PPS5]  20.83,83.13 90 bottom
U$191  [PPS0]  42.57,87.58 90 top
U$192  [3V3-04]  30.99,108.13 90 bottom
U$193  [3V3-04]  30.99,108.13 90 top
U$194  [GND-04]  25.91,108 90 bottom
U$195  [GND-04]  25.91,108 90 top
U$196  [PWR-()-03]  45.11,87.33 90 top
U$197  [5V]  28.45,109.14 90 top
U$198  [5V]  28.45,109.14 90 bottom
U$199  [CS#-<]]  33.55,109.4 90 top
U$200  [CS#-<]]  33.55,109.4 90 bottom
U$201  [SCK-(]-04]  41.15,108.28 90 top
U$202  [SCK-(]-04]  41.15,108.28 90 bottom
U$203  [SFE_LOGO_FLAME_.1]  45.21,104.83 90 top
U$204  [RX#MOSI2]  36.07,106.65 90 top
U$205  [RX#MOSI3]  36.09,105.71 90 bottom
U$206  [TX#MISO0]  38.63,106.48 90 top
U$207  [TX#MISO1]  38.63,105.51 90 bottom
U$208  [NEO#M9N1]  34.54,97.49 0 bottom
U$209  [SPI1]  37.59,89.1 0 bottom
U$210  [QWIIC_4MM]  45.21,102.06 0 top
U$211  [QWIIC_4MM]  9.14,93.42 0 top
U$212  [PPS0]  46.74,91.14 0 bottom
U$213  [PWR1]  47.24,93.42 0 bottom
U$214  [NEO_GPS_BOARD_SILK_FINAL#03#JPG]  22.1,92.91 0 bottom
U$215  [ANT0]  41.15,101.55 90 top
U$216  [SDA-[)]  77.22,83.13 90 top
U$217  [SCL-[)]  79.76,83.13 90 top
U$218  [SDA-[)]  77.22,83.13 90 bottom
U$219  [SCL-[)]  79.76,83.13 90 bottom
U$220  [3V3-04]  74.68,83.13 90 top
U$221  [3V3-04]  74.68,83.13 90 bottom
U$222  [GND-04]  72.14,83.13 90 top
U$223  [GND-04]  72.14,83.13 90 bottom
U$224  [I_SUPER2_C-()-03]  54.48,105.84 0 bottom
U$225  [INT8]  69.6,83.13 90 top
U$226  [INT8]  69.6,83.13 90 bottom
U$227  [U#BLOX3]  72.52,99.87 0 bottom
U$228  [#RST3]  64.52,82.88 90 top
U$229  [#RST3]  64.52,82.88 90 bottom
U$230  [#SAFE1]  67.06,82.88 90 top
U$231  [#SAFE1]  67.06,82.88 90 bottom
U$232  [PPS5]  61.98,83.13 90 top
U$233  [PPS5]  61.98,83.13 90 bottom
U$234  [PPS0]  83.72,87.58 90 top
U$235  [3V3-04]  72.14,108.13 90 bottom
U$236  [3V3-04]  72.14,108.13 90 top
U$237  [GND-04]  67.06,108 90 bottom
U$238  [GND-04]  67.06,108 90 top
U$239  [PWR-()-03]  86.26,87.33 90 top
U$240  [5V]  69.6,109.14 90 top
U$241  [5V]  69.6,109.14 90 bottom
U$242  [CS#-<]]  74.7,109.4 90 top
U$243  [CS#-<]]  74.7,109.4 90 bottom
U$244  [SCK-(]-04]  82.3,108.28 90 top
U$245  [SCK-(]-04]  82.3,108.28 90 bottom
U$246  [SFE_LOGO_FLAME_.1]  86.36,104.83 90 top
U$247  [RX#MOSI2]  77.22,106.65 90 top
U$248  [RX#MOSI3]  77.24,105.71 90 bottom
U$249  [TX#MISO0]  79.78,106.48 90 top
U$250  [TX#MISO1]  79.78,105.51 90 bottom
U$251  [NEO#M9N1]  75.69,97.49 0 bottom
U$252  [SPI1]  78.74,89.1 0 bottom
U$253  [QWIIC_4MM]  86.36,102.06 0 top
U$254  [QWIIC_4MM]  50.29,93.42 0 top
U$255  [PPS0]  87.88,91.14 0 bottom
U$256  [PWR1]  88.39,93.42 0 bottom
U$257  [NEO_GPS_BOARD_SILK_FINAL#03#JPG]  63.25,92.91 0 bottom
U$258  [ANT0]  82.3,101.55 90 top
U$259  [SDA-[)]  36.07,119.18 90 top
U$260  [SCL-[)]  38.61,119.18 90 top
U$261  [SDA-[)]  36.07,119.18 90 bottom
U$262  [SCL-[)]  38.61,119.18 90 bottom
U$263  [3V3-04]  33.53,119.18 90 top
U$264  [3V3-04]  33.53,119.18 90 bottom
U$265  [GND-04]  30.99,119.18 90 top
U$266  [GND-04]  30.99,119.18 90 bottom
U$267  [I_SUPER2_C-()-03]  13.34,141.88 0 bottom
U$268  [INT8]  28.45,119.18 90 top
U$269  [INT8]  28.45,119.18 90 bottom
U$270  [U#BLOX3]  31.37,135.92 0 bottom
U$271  [#RST3]  23.37,118.92 90 top
U$272  [#RST3]  23.37,118.92 90 bottom
U$273  [#SAFE1]  25.91,118.92 90 top
U$274  [#SAFE1]  25.91,118.92 90 bottom
U$275  [PPS5]  20.83,119.18 90 top
U$276  [PPS5]  20.83,119.18 90 bottom
U$277  [PPS0]  42.57,123.62 90 top
U$278  [3V3-04]  30.99,144.17 90 bottom
U$279  [3V3-04]  30.99,144.17 90 top
U$280  [GND-04]  25.91,144.04 90 bottom
U$281  [GND-04]  25.91,144.04 90 top
U$282  [PWR-()-03]  45.11,123.37 90 top
U$283  [5V]  28.45,145.19 90 top
U$284  [5V]  28.45,145.19 90 bottom
U$285  [CS#-<]]  33.55,145.44 90 top
U$286  [CS#-<]]  33.55,145.44 90 bottom
U$287  [SCK-(]-04]  41.15,144.32 90 top
U$288  [SCK-(]-04]  41.15,144.32 90 bottom
U$289  [SFE_LOGO_FLAME_.1]  45.21,140.87 90 top
U$290  [RX#MOSI2]  36.07,142.7 90 top
U$291  [RX#MOSI3]  36.09,141.76 90 bottom
U$292  [TX#MISO0]  38.63,142.52 90 top
U$293  [TX#MISO1]  38.63,141.55 90 bottom
U$294  [NEO#M9N1]  34.54,133.53 0 bottom
U$295  [SPI1]  37.59,125.15 0 bottom
U$296  [QWIIC_4MM]  45.21,138.1 0 top
U$297  [QWIIC_4MM]  9.14,129.46 0 top
U$298  [PPS0]  46.74,127.18 0 bottom
U$299  [PWR1]  47.24,129.46 0 bottom
U$300  [NEO_GPS_BOARD_SILK_FINAL#03#JPG]  22.1,128.96 0 bottom
U$301  [ANT0]  41.15,137.59 90 top
U$302  [SDA-[)]  77.22,119.18 90 top
U$303  [SCL-[)]  79.76,119.18 90 top
U$304  [SDA-[)]  77.22,119.18 90 bottom
U$305  [SCL-[)]  79.76,119.18 90 bottom
U$306  [3V3-04]  74.68,119.18 90 top
U$307  [3V3-04]  74.68,119.18 90 bottom
U$308  [GND-04]  72.14,119.18 90 top
U$309  [GND-04]  72.14,119.18 90 bottom
U$310  [I_SUPER2_C-()-03]  54.48,141.88 0 bottom
U$311  [INT8]  69.6,119.18 90 top
U$312  [INT8]  69.6,119.18 90 bottom
U$313  [U#BLOX3]  72.52,135.92 0 bottom
U$314  [#RST3]  64.52,118.92 90 top
U$315  [#RST3]  64.52,118.92 90 bottom
U$316  [#SAFE1]  67.06,118.92 90 top
U$317  [#SAFE1]  67.06,118.92 90 bottom
U$318  [PPS5]  61.98,119.18 90 top
U$319  [PPS5]  61.98,119.18 90 bottom
U$320  [PPS0]  83.72,123.62 90 top
U$321  [3V3-04]  72.14,144.17 90 bottom
U$322  [3V3-04]  72.14,144.17 90 top
U$323  [GND-04]  67.06,144.04 90 bottom
U$324  [GND-04]  67.06,144.04 90 top
U$325  [PWR-()-03]  86.26,123.37 90 top
U$326  [5V]  69.6,145.19 90 top
U$327  [5V]  69.6,145.19 90 bottom
U$328  [CS#-<]]  74.7,145.44 90 top
U$329  [CS#-<]]  74.7,145.44 90 bottom
U$330  [SCK-(]-04]  82.3,144.32 90 top
U$331  [SCK-(]-04]  82.3,144.32 90 bottom
U$332  [SFE_LOGO_FLAME_.1]  86.36,140.87 90 top
U$333  [RX#MOSI2]  77.22,142.7 90 top
U$334  [RX#MOSI3]  77.24,141.76 90 bottom
U$335  [TX#MISO0]  79.78,142.52 90 top
U$336  [TX#MISO1]  79.78,141.55 90 bottom
U$337  [NEO#M9N1]  75.69,133.53 0 bottom
U$338  [SPI1]  78.74,125.15 0 bottom
U$339  [QWIIC_4MM]  86.36,138.1 0 top
U$340  [QWIIC_4MM]  50.29,129.46 0 top
U$341  [PPS0]  87.88,127.18 0 bottom
U$342  [PWR1]  88.39,129.46 0 bottom
U$343  [NEO_GPS_BOARD_SILK_FINAL#03#JPG]  63.25,128.96 0 bottom
U$344  [ANT0]  82.3,137.59 90 top

## Library data of the parts
B1-B8 = SparkFun-Batteries; PROD_ID: BATT-14267
C1 C10 C15 C20 C25 C30 C35 C40 = SparkFun-Capacitors; PROD_ID: CAP-08913
C2-C4 C6 C7 C9 C11 C12 C14 C16 C17 C19 C21 C22 C24 C26 C27 C29 C31 C32 C34 C36 C37 C39 = SparkFun-Capacitors; PROD_ID: CAP-00868
C5 C8 C13 C18 C23 C28 C33 C38 = SparkFun-Capacitors; PROD_ID: CAP-00810
D1 D2 D5 D7 D9 D11 D13 D15 = SparkFun-DiscreteSemi; PROD_ID: DIO-10955
D3 D4 D6 D8 D10 D12 D14 D16 = SparkFun-IC-Power; PROD_ID: DIO-14084
E$1 E$2 LOGO1-LOGO16 U$13 U$14 U$33 U$74 U$81 U$82 U$117 U$124 U$125 U$160 U$167 U$168 U$203 U$210 U$211 U$246 U$253 U$254 U$289 U$296 U$297 U$332 U$339 U$340 = SparkFun-Aesthetics
E$3 = SparkFun-Retired
FB1-FB8 = SparkFun-Coils; PROD_ID: NDUC-13805
J1 J9 J16 J22 J28 J34 J40 J46 = SparkFun-Connectors
J2 J4 J6 J7 J12 J14 J19 J20 J25 J26 J31 J32 J37 J38 J43 J44 = SparkFun-Connectors; PROD_ID: CONN-13694
J3 J11 J18 J24 J30 J36 J42 J48 = SparkFun-Connectors; PROD_ID: CONN-14122
J5 J10 J17 J23 J29 J35 J41 J47 JP11 JP15 JP23 JP34 JP45 JP55 JP66 JP77 = SparkFun-Connectors; PROD_ID: CONN-09696
J8 J13 J15 J21 J27 J33 J39 J45 = SparkFun-Connectors; PROD_ID: CONN-09193; SF_ID: WRL-09144
JP1-JP4 JP7-JP10 JP12-JP14 JP16 JP18-JP22 JP24-JP27 JP29-JP33 JP35-JP38 JP40-JP44 JP46-JP49 JP51-JP54 JP56-JP59 JP61-JP65 JP67-JP71 JP73-JP76 JP81 JP91 JP101 = SparkFun
JP5 JP6 JP17 JP28 JP39 JP50 JP60 JP72 PPS PPS1-PPS7 PWR\ PWR\1-PWR\7 SPI SPI1-SPI7 = SparkFun-Jumpers
LED1 LED3 LED5 LED7 LED9 LED11 LED13 LED15 = SparkFun-LED; PROD_ID: DIO-08575
LED2 LED4 LED6 LED8 LED10 LED12 LED14 LED16 = SparkFun-LED; PROD_ID: DIO-00819
R1 R5 R11 R21 R22 R25 R37 R38 R41 R53 R54 R57 R69 R70 R73 R85 R86 R89 R101 R102 R105 R117 R118 R121 = SparkFun-Resistors; PROD_ID: RES-07856
R2-R4 R6 R17 R18 R23 R24 R33 R34 R39 R40 R49 R50 R55 R56 R65 R66 R71 R72 R81 R82 R87 R88 R97 R98 R103 R104 R113 R114 R119 R120 = SparkFun-Resistors; PROD_ID: RES-08270
R7 R8 R19 R20 R35 R36 R51 R52 R67 R68 R83 R84 R99 R100 R115 R116 = SparkFun-Resistors; PROD_ID: RES-08272
R9 R10 R26 R27 R42 R43 R58 R59 R74 R75 R90 R91 R106 R107 R122 R123 = SparkFun-Resistors; PROD_ID: RES-09334
R12 R13 R30 R31 R46 R47 R62 R63 R78 R79 R94 R95 R110 R111 R126 R127 = SparkFun-Resistors; PROD_ID: RES-12083
R14 R28 R44 R60 R76 R92 R108 R124 = SparkFun-Resistors; PROD_ID: RES-12581
R15 R29 R45 R61 R77 R93 R109 R125 = SparkFun-Resistors; PROD_ID: RES-07828
R16 R32 R48 R64 R80 R96 R112 R128 = SparkFun-Resistors; PROD_ID: RES-14241
U1 U4 U6 U8 U10 U12 U14 U16 = gps; PROD_ID: IC-14651
U2 U3 U5 U7 U9 U11 U13 U15 = SparkFun-IC-Power; PROD_ID: VREG-12457
U$1 U$3-U$10 U$18-U$20 U$23 U$24 U$27-U$30 U$32 U$38 U$41 U$42 U$45-U$47 U$59-U$73 U$87-U$95 U$106-U$116 U$130-U$138 U$149-U$159 U$173-U$181 U$192-U$202 U$216-U$224 U$235-U$245 U$259-U$267 U$278-U$288 U$302-U$310 U$321-U$331 = Labels
U$2 U$11 U$79 U$80 U$122 U$123 U$165 U$166 U$208 U$209 U$251 U$252 U$294 U$295 U$337 U$338 = board lables
U$12 U$17 U$83 U$84 U$126 U$127 U$169 U$170 U$212 U$213 U$255 U$256 U$298 U$299 U$341 U$342 = LEDs
U$15 U$16 U$22 U$48-U$50 U$96-U$98 U$139-U$141 U$182-U$184 U$225-U$227 U$268-U$270 U$311-U$313 = buzzard_labels (5)
U$21 U$85 U$128 U$171 U$214 U$257 U$300 U$343 = NEO_GPS_board_silk_FINAL#03#jpg
U$25 U$86 U$129 U$172 U$215 U$258 U$301 U$344 = ANT
U$26 U$31 U$34 U$37 U$75-U$78 U$118-U$121 U$161-U$164 U$204-U$207 U$247-U$250 U$290-U$293 U$333-U$336 = buzzard_labels (36)
U$35 U$36 U$39 U$40 U$43 U$44 U$51 U$53-U$57 U$99-U$104 U$142-U$147 U$185-U$190 U$228-U$233 U$271-U$276 U$314-U$319 = buzzard_labels (7)
U$52 U$58 U$105 U$148 U$191 U$234 U$277 U$320 = buzzard_labels (33)

## Nets
3.3V [3.3V]: C4.1 C5.2 D2.A J1.3 J2.2 J4.2 J5.2 JP5.2 PWR\.2 R15.2 R16.2 U1.7 U1.23 U2.5
3.3V1 [3.3V]: C7.1 C8.2 D1.A J6.2 J7.2 J9.3 J10.2 JP6.2 PWR\1.2 R29.2 R32.2 U3.5 U4.7 U4.23
3.3V2 [3.3V]: C12.1 C13.2 D5.A J12.2 J14.2 J16.3 J17.2 JP17.2 PWR\2.2 R45.2 R48.2 U5.5 U6.7 U6.23
3.3V3 [3.3V]: C17.1 C18.2 D7.A J19.2 J20.2 J22.3 J23.2 JP28.2 PWR\3.2 R61.2 R64.2 U7.5 U8.7 U8.23
3.3V4 [3.3V]: C22.1 C23.2 D9.A J25.2 J26.2 J28.3 J29.2 JP39.2 PWR\4.2 R77.2 R80.2 U9.5 U10.7 U10.23
3.3V5 [3.3V]: C27.1 C28.2 D11.A J31.2 J32.2 J34.3 J35.2 JP50.2 PWR\5.2 R93.2 R96.2 U11.5 U12.7 U12.23
3.3V6 [3.3V]: C32.1 C33.2 D13.A J37.2 J38.2 J40.3 J41.2 JP60.2 PWR\6.2 R109.2 R112.2 U13.5 U14.7 U14.23
3.3V7 [3.3V]: C37.1 C38.2 D15.A J43.2 J44.2 J46.3 J47.2 JP72.2 PWR\7.2 R125.2 R128.2 U15.5 U16.7 U16.23
5V: C6.1 D3.5 J1.2 J3.VBUS1 J3.VBUS2 U2.1 U2.3
5V1: C9.1 D4.5 J9.2 J11.VBUS1 J11.VBUS2 U3.1 U3.3
5V2: C14.1 D6.5 J16.2 J18.VBUS1 J18.VBUS2 U5.1 U5.3
5V3: C19.1 D8.5 J22.2 J24.VBUS1 J24.VBUS2 U7.1 U7.3
5V4: C24.1 D10.5 J28.2 J30.VBUS1 J30.VBUS2 U9.1 U9.3
5V5: C29.1 D12.5 J34.2 J36.VBUS1 J36.VBUS2 U11.1 U11.3
5V6: C34.1 D14.5 J40.2 J42.VBUS1 J42.VBUS2 U13.1 U13.3
5V7: C39.1 D16.5 J46.2 J48.VBUS1 J48.VBUS2 U15.1 U15.3
!RESET: JP15.3 U1.8
!RESET1: JP11.3 U4.8
!RESET2: JP23.3 U6.8
!RESET3: JP34.3 U8.8
!RESET4: JP45.3 U10.8
!RESET5: JP55.3 U12.8
!RESET6: JP66.3 U14.8
!RESET7: JP77.3 U16.8
!SAFE: JP15.2 U1.1
!SAFE1: JP11.2 U4.1
!SAFE2: JP23.2 U6.1
!SAFE3: JP34.2 U8.1
!SAFE4: JP45.2 U10.1
!SAFE5: JP55.2 U12.1
!SAFE6: JP66.2 U14.1
!SAFE7: JP77.2 U16.1
ANT_VCC: C1.1 FB1.2 R14.1
ANT_VCC1: C10.1 FB2.2 R28.1
ANT_VCC2: C15.1 FB3.2 R44.1
ANT_VCC3: C20.1 FB4.2 R60.1
ANT_VCC4: C25.1 FB5.2 R76.1
ANT_VCC5: C30.1 FB6.2 R92.1
ANT_VCC6: C35.1 FB7.2 R108.1
ANT_VCC7: C40.1 FB8.2 R124.1
BACKUP: B1.+ C3.1 R5.1 U1.22
BACKUP1: B2.+ C2.1 R21.1 U4.22
BACKUP2: B3.+ C11.1 R37.1 U6.22
BACKUP3: B4.+ C16.1 R53.1 U8.22
BACKUP4: B5.+ C21.1 R69.1 U10.22
BACKUP5: B6.+ C26.1 R85.1 U12.22
BACKUP6: B7.+ C31.1 R101.1 U14.22
BACKUP7: B8.+ C36.1 R117.1 U16.22
D+: D3.4 R9.1
D+1: D4.4 R26.1
D+2: D6.4 R42.1
D+3: D8.4 R58.1
D+4: D10.4 R74.1
D+5: D12.4 R90.1
D+6: D14.4 R106.1
D+7: D16.4 R122.1
D-: D3.6 R10.1
D-1: D4.6 R27.1
D-2: D6.6 R43.1
D-3: D8.6 R59.1
D-4: D10.6 R75.1
D-5: D12.6 R91.1
D-6: D14.6 R107.1
D-7: D16.6 R123.1
D_SEL: R16.1 SPI.2 U1.2
D_SEL1: R32.1 SPI1.2 U4.2
D_SEL2: R48.1 SPI2.2 U6.2
D_SEL3: R64.1 SPI3.2 U8.2
D_SEL4: R80.1 SPI4.2 U10.2
D_SEL5: R96.1 SPI5.2 U12.2
D_SEL6: R112.1 SPI6.2 U14.2
D_SEL7: R128.1 SPI7.2 U16.2
GND: B1.- C1.2 C3.2 C4.2 C5.1 C6.2 D3.2 J1.1 J2.1 J3.GND J3.GND2 J4.1 J5.1 J13.1 J13.2 LED1.C LED2.C R12.1 R13.1 R15.1 SPI.1 U1.10 U1.12 U1.13 U1.24 U2.2
GND1: B2.- C2.2 C7.2 C8.1 C9.2 C10.2 D4.2 J6.1 J7.1 J8.1 J8.2 J9.1 J10.1 J11.GND J11.GND2 LED3.C LED4.C R29.1 R30.1 R31.1 SPI1.1 U3.2 U4.10 U4.12 U4.13 U4.24
GND2: B3.- C11.2 C12.2 C13.1 C14.2 C15.2 D6.2 J12.1 J14.1 J15.1 J15.2 J16.1 J17.1 J18.GND J18.GND2 LED5.C LED6.C R45.1 R46.1 R47.1 SPI2.1 U5.2 U6.10 U6.12 U6.13 U6.24
GND3: B4.- C16.2 C17.2 C18.1 C19.2 C20.2 D8.2 J19.1 J20.1 J21.1 J21.2 J22.1 J23.1 J24.GND J24.GND2 LED7.C LED8.C R61.1 R62.1 R63.1 SPI3.1 U7.2 U8.10 U8.12 U8.13 U8.24
GND4: B5.- C21.2 C22.2 C23.1 C24.2 C25.2 D10.2 J25.1 J26.1 J27.1 J27.2 J28.1 J29.1 J30.GND J30.GND2 LED9.C LED10.C R77.1 R78.1 R79.1 SPI4.1 U9.2 U10.10 U10.12 U10.13 U10.24
GND5: B6.- C26.2 C27.2 C28.1 C29.2 C30.2 D12.2 J31.1 J32.1 J33.1 J33.2 J34.1 J35.1 J36.GND J36.GND2 LED11.C LED12.C R93.1 R94.1 R95.1 SPI5.1 U11.2 U12.10 U12.12 U12.13 U12.24
GND6: B7.- C31.2 C32.2 C33.1 C34.2 C35.2 D14.2 J37.1 J38.1 J39.1 J39.2 J40.1 J41.1 J42.GND J42.GND2 LED13.C LED14.C R109.1 R110.1 R111.1 SPI6.1 U13.2 U14.10 U14.12 U14.13 U14.24
GND7: B8.- C36.2 C37.2 C38.1 C39.2 C40.2 D16.2 J43.1 J44.1 J45.1 J45.2 J46.1 J47.1 J48.GND J48.GND2 LED15.C LED16.C R125.1 R126.1 R127.1 SPI7.1 U15.2 U16.10 U16.12 U16.13 U16.24
GPS_ANT1: FB1.1 J13.FEED U1.11
GPS_ANT2: FB2.1 J8.FEED U4.11
GPS_ANT3: FB3.1 J15.FEED U6.11
GPS_ANT4: FB4.1 J21.FEED U8.11
GPS_ANT5: FB5.1 J27.FEED U10.11
GPS_ANT6: FB6.1 J33.FEED U12.11
GPS_ANT7: FB7.1 J39.FEED U14.11
GPS_ANT8: FB8.1 J45.FEED U16.11
INT: JP15.1 U1.4
INT1: JP11.1 U4.4
INT2: JP23.1 U6.4
INT3: JP34.1 U8.4
INT4: JP45.1 U10.4
INT5: JP55.1 U12.4
INT6: JP66.1 U14.4
INT7: JP77.1 U16.4
N$1: PWR\.1 R1.2
N$2: LED1.A R11.1
N$3: JP6.1 R20.2
N$4: PPS.1 R11.2
N$5: JP5.1 R8.2
N$6: D2.C R5.2
N$7: J3.B5 R12.2
N$8: JP5.3 R7.2
N$9: J3.A5 R13.2
N$10: LED2.A R1.1
N$11: R9.2 U1.6
N$12: R10.2 U1.5
N$13: JP6.3 R19.2
N$14: LED3.A R22.1
N$15: PPS1.1 R22.2
N$16: D1.C R21.2
N$17: LED4.A R25.1
N$18: R26.2 U4.6
N$19: R27.2 U4.5
N$20: PWR\1.1 R25.2
N$21: J11.B5 R30.2
N$22: J11.A5 R31.2
N$23: JP17.1 R36.2
N$24: JP17.3 R35.2
N$25: LED5.A R38.1
N$26: PPS2.1 R38.2
N$27: D5.C R37.2
N$28: LED6.A R41.1
N$29: R42.2 U6.6
N$30: R43.2 U6.5
N$31: PWR\2.1 R41.2
N$32: J18.B5 R46.2
N$33: J18.A5 R47.2
N$34: JP28.1 R52.2
N$35: JP28.3 R51.2
N$36: LED7.A R54.1
N$37: PPS3.1 R54.2
N$38: D7.C R53.2
N$39: LED8.A R57.1
N$40: R58.2 U8.6
N$41: R59.2 U8.5
N$42: PWR\3.1 R57.2
N$43: J24.B5 R62.2
N$44: J24.A5 R63.2
N$45: JP39.1 R68.2
N$46: JP39.3 R67.2
N$47: LED9.A R70.1
N$48: PPS4.1 R70.2
N$49: D9.C R69.2
N$50: LED10.A R73.1
N$51: R74.2 U10.6
N$52: R75.2 U10.5
N$53: PWR\4.1 R73.2
N$54: J30.B5 R78.2
N$55: J30.A5 R79.2
N$56: JP50.1 R84.2
N$57: JP50.3 R83.2
N$58: LED11.A R86.1
N$59: PPS5.1 R86.2
N$60: D11.C R85.2
N$61: LED12.A R89.1
N$62: R90.2 U12.6
N$63: R91.2 U12.5
N$64: PWR\5.1 R89.2
N$65: J36.B5 R94.2
N$66: J36.A5 R95.2
N$67: JP60.1 R100.2
N$68: JP60.3 R99.2
N$69: LED13.A R102.1
N$70: PPS6.1 R102.2
N$71: D13.C R101.2
N$72: LED14.A R105.1
N$73: R106.2 U14.6
N$74: R107.2 U14.5
N$75: PWR\6.1 R105.2
N$76: J42.B5 R110.2
N$77: J42.A5 R111.2
N$78: JP72.1 R116.2
N$79: JP72.3 R115.2
N$80: LED15.A R118.1
N$81: PPS7.1 R118.2
N$82: D15.C R117.2
N$83: LED16.A R121.1
N$84: R122.2 U16.6
N$85: R123.2 U16.5
N$86: PWR\7.1 R121.2
N$87: J48.B5 R126.2
N$88: J48.A5 R127.2
PPS: JP15.4 PPS.2 U1.3
PPS1: JP11.4 PPS1.2 U4.3
PPS2: JP23.4 PPS2.2 U6.3
PPS3: JP34.4 PPS3.2 U8.3
PPS4: JP45.4 PPS4.2 U10.3
PPS5: JP55.4 PPS5.2 U12.3
PPS6: JP66.4 PPS6.2 U14.3
PPS7: JP77.4 PPS7.2 U16.3
RXI/MOSI: J1.5 R6.2
RXI/MOSI1: J9.5 R18.2
RXI/MOSI2: J16.5 R34.2
RXI/MOSI3: J22.5 R50.2
RXI/MOSI4: J28.5 R66.2
RXI/MOSI5: J34.5 R82.2
RXI/MOSI6: J40.5 R98.2
RXI/MOSI7: J46.5 R114.2
RXLV: R6.1 U1.21
RXLV1: R18.1 U4.21
RXLV2: R34.1 U6.21
RXLV3: R50.1 U8.21
RXLV4: R66.1 U10.21
RXLV5: R82.1 U12.21
RXLV6: R98.1 U14.21
RXLV7: R114.1 U16.21
SCL/SCK: J1.7 J2.4 J4.4 J5.4 R4.2 R7.1
SCL/SCK1: J6.4 J7.4 J9.7 J10.4 R19.1 R24.2
SCL/SCK2: J12.4 J14.4 J16.7 J17.4 R35.1 R40.2
SCL/SCK3: J19.4 J20.4 J22.7 J23.4 R51.1 R56.2
SCL/SCK4: J25.4 J26.4 J28.7 J29.4 R67.1 R72.2
SCL/SCK5: J31.4 J32.4 J34.7 J35.4 R83.1 R88.2
SCL/SCK6: J37.4 J38.4 J40.7 J41.4 R99.1 R104.2
SCL/SCK7: J43.4 J44.4 J46.7 J47.4 R115.1 R120.2
SCL_LV: R4.1 U1.19
SCL_LV1: R24.1 U4.19
SCL_LV2: R40.1 U6.19
SCL_LV3: R56.1 U8.19
SCL_LV4: R72.1 U10.19
SCL_LV5: R88.1 U12.19
SCL_LV6: R104.1 U14.19
SCL_LV7: R120.1 U16.19
SDA/!CS: J1.4 J2.3 J4.3 J5.3 R2.2 R8.1
SDA/!CS1: J6.3 J7.3 J9.4 J10.3 R20.1 R23.2
SDA/!CS2: J12.3 J14.3 J16.4 J17.3 R36.1 R39.2
SDA/!CS3: J19.3 J20.3 J22.4 J23.3 R52.1 R55.2
SDA/!CS4: J25.3 J26.3 J28.4 J29.3 R68.1 R71.2
SDA/!CS5: J31.3 J32.3 J34.4 J35.3 R84.1 R87.2
SDA/!CS6: J37.3 J38.3 J40.4 J41.3 R100.1 R103.2
SDA/!CS7: J43.3 J44.3 J46.4 J47.3 R116.1 R119.2
SDA_LV: R2.1 U1.18
SDA_LV1: R23.1 U4.18
SDA_LV2: R39.1 U6.18
SDA_LV3: R55.1 U8.18
SDA_LV4: R71.1 U10.18
SDA_LV5: R87.1 U12.18
SDA_LV6: R103.1 U14.18
SDA_LV7: R119.1 U16.18
SHLD: J3.SHLD1 J3.SHLD2 J3.SHLD3 J3.SHLD4 J3.SHLD5 J3.SHLD6 J3.SHLD7 J3.SHLD8
SHLD1: J11.SHLD1 J11.SHLD2 J11.SHLD3 J11.SHLD4 J11.SHLD5 J11.SHLD6 J11.SHLD7 J11.SHLD8
SHLD2: J18.SHLD1 J18.SHLD2 J18.SHLD3 J18.SHLD4 J18.SHLD5 J18.SHLD6 J18.SHLD7 J18.SHLD8
SHLD3: J24.SHLD1 J24.SHLD2 J24.SHLD3 J24.SHLD4 J24.SHLD5 J24.SHLD6 J24.SHLD7 J24.SHLD8
SHLD4: J30.SHLD1 J30.SHLD2 J30.SHLD3 J30.SHLD4 J30.SHLD5 J30.SHLD6 J30.SHLD7 J30.SHLD8
SHLD5: J36.SHLD1 J36.SHLD2 J36.SHLD3 J36.SHLD4 J36.SHLD5 J36.SHLD6 J36.SHLD7 J36.SHLD8
SHLD6: J42.SHLD1 J42.SHLD2 J42.SHLD3 J42.SHLD4 J42.SHLD5 J42.SHLD6 J42.SHLD7 J42.SHLD8
SHLD7: J48.SHLD1 J48.SHLD2 J48.SHLD3 J48.SHLD4 J48.SHLD5 J48.SHLD6 J48.SHLD7 J48.SHLD8
TXLV: R3.1 U1.20
TXLV1: R17.1 U4.20
TXLV2: R33.1 U6.20
TXLV3: R49.1 U8.20
TXLV4: R65.1 U10.20
TXLV5: R81.1 U12.20
TXLV6: R97.1 U14.20
TXLV7: R113.1 U16.20
TXO/MISO: J1.6 R3.2
TXO/MISO1: J9.6 R17.2
TXO/MISO2: J16.6 R33.2
TXO/MISO3: J22.6 R49.2
TXO/MISO4: J28.6 R65.2
TXO/MISO5: J34.6 R81.2
TXO/MISO6: J40.6 R97.2
TXO/MISO7: J46.6 R113.2
USB_D+: D3.3 J3.A6 J3.B6
USB_D+1: D4.3 J11.A6 J11.B6
USB_D+2: D6.3 J18.A6 J18.B6
USB_D+3: D8.3 J24.A6 J24.B6
USB_D+4: D10.3 J30.A6 J30.B6
USB_D+5: D12.3 J36.A6 J36.B6
USB_D+6: D14.3 J42.A6 J42.B6
USB_D+7: D16.3 J48.A6 J48.B6
USB_D-: D3.1 J3.A7 J3.B7
USB_D-1: D4.1 J11.A7 J11.B7
USB_D-2: D6.1 J18.A7 J18.B7
USB_D-3: D8.1 J24.A7 J24.B7
USB_D-4: D10.1 J30.A7 J30.B7
USB_D-5: D12.1 J36.A7 J36.B7
USB_D-6: D14.1 J42.A7 J42.B7
USB_D-7: D16.1 J48.A7 J48.B7
VCC_RF: R14.2 U1.9
VCC_RF1: R28.2 U4.9
VCC_RF2: R44.2 U6.9
VCC_RF3: R60.2 U8.9
VCC_RF4: R76.2 U10.9
VCC_RF5: R92.2 U12.9
VCC_RF6: R108.2 U14.9
VCC_RF7: R124.2 U16.9

## Tracks (layer width: path | path; a pad name or v marks a point on that pad's centre or on a via)
3.3V  (via drill 0.3, 0.51)
  Top 0.508: v13.21,26.13 J2.2 | U2.5 36.45,24.4 C4.1 34.35,25.23 U1.7 | U2.5 36.55,25.09 v36.58,25.12 | J4.2 v43.69,25.12 | v37.34,22.55 37.34,22.84 36.55,23.63 U2.5 | 32.82,13.26 31.88,14.2 20.83,14.2 19.56,15.47 19.56,16.1 | 32.82,13.26 33.53,12.55 J5.2 | 19.56,17.5 19.56,19.28 20.01,19.73 U1.23 | v14.73,16.23 14.86,16.1 19.56,16.1 | D2.A 19.56,17.5 | R15.2 23.82,36.47 v24,36.3 | 32.82,13.26 33.1,13.54 35.61,13.54 v35.64,13.56 | 19.56,16.1 C5.2 | 19.56,17.5 19.56,16.1 | R16.2 36.7,19.11 v36.7,17.88
  Bottom 0.152: PWR\.2 41.17,21.08 37.46,21.08